# Altium PCB PCB1.PcbDoc
Units mil, origin at the board's own origin, x right, y up, seen from the top; angles counter-clockwise.
Board outline 4725 x 1770 mil, 2 copper layers (Top Layer, Bottom Layer); 13 components, 23 nets, 104 pads, 4 vias.
Unrouted connection lines stored in the file: 5.
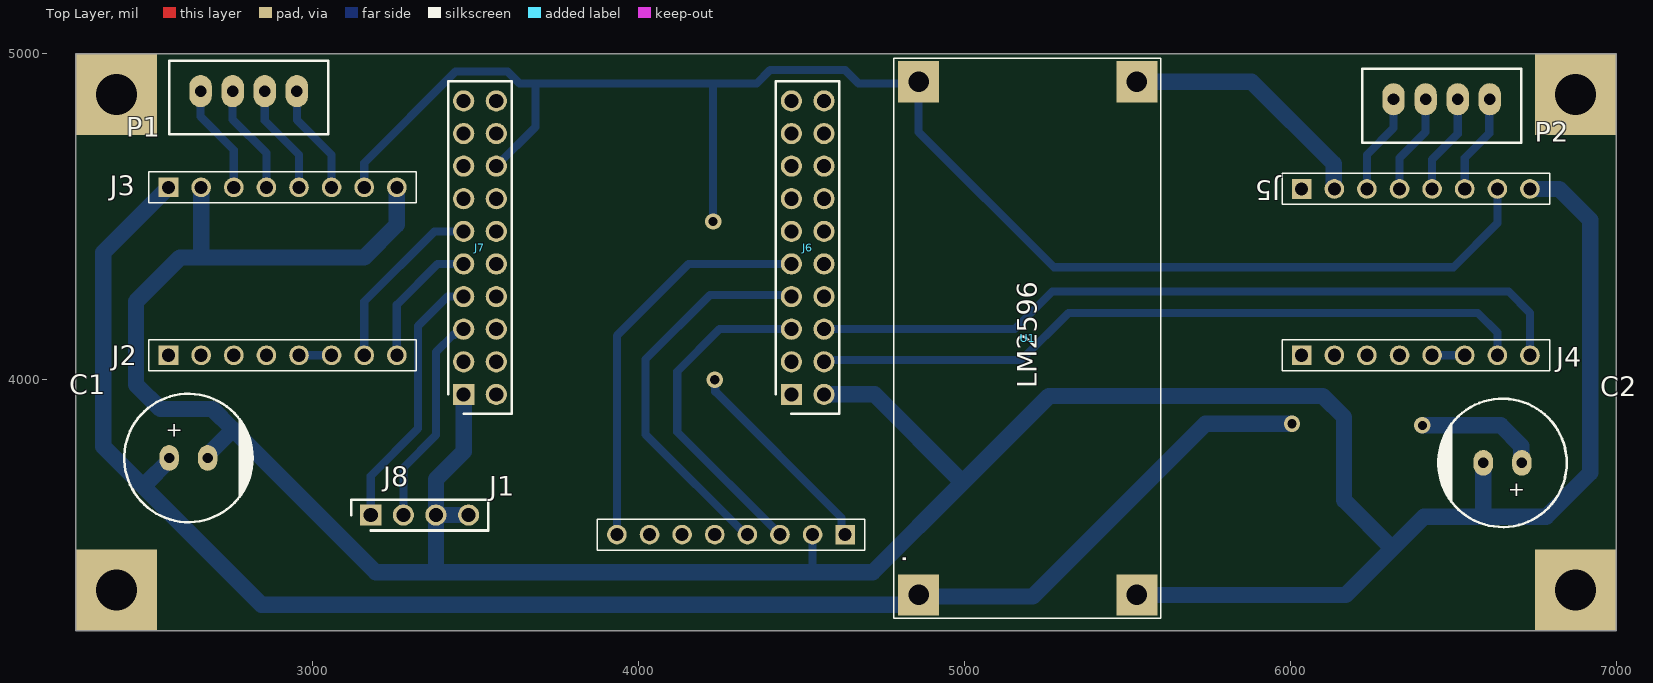
[diagram p0: Top Layer view]
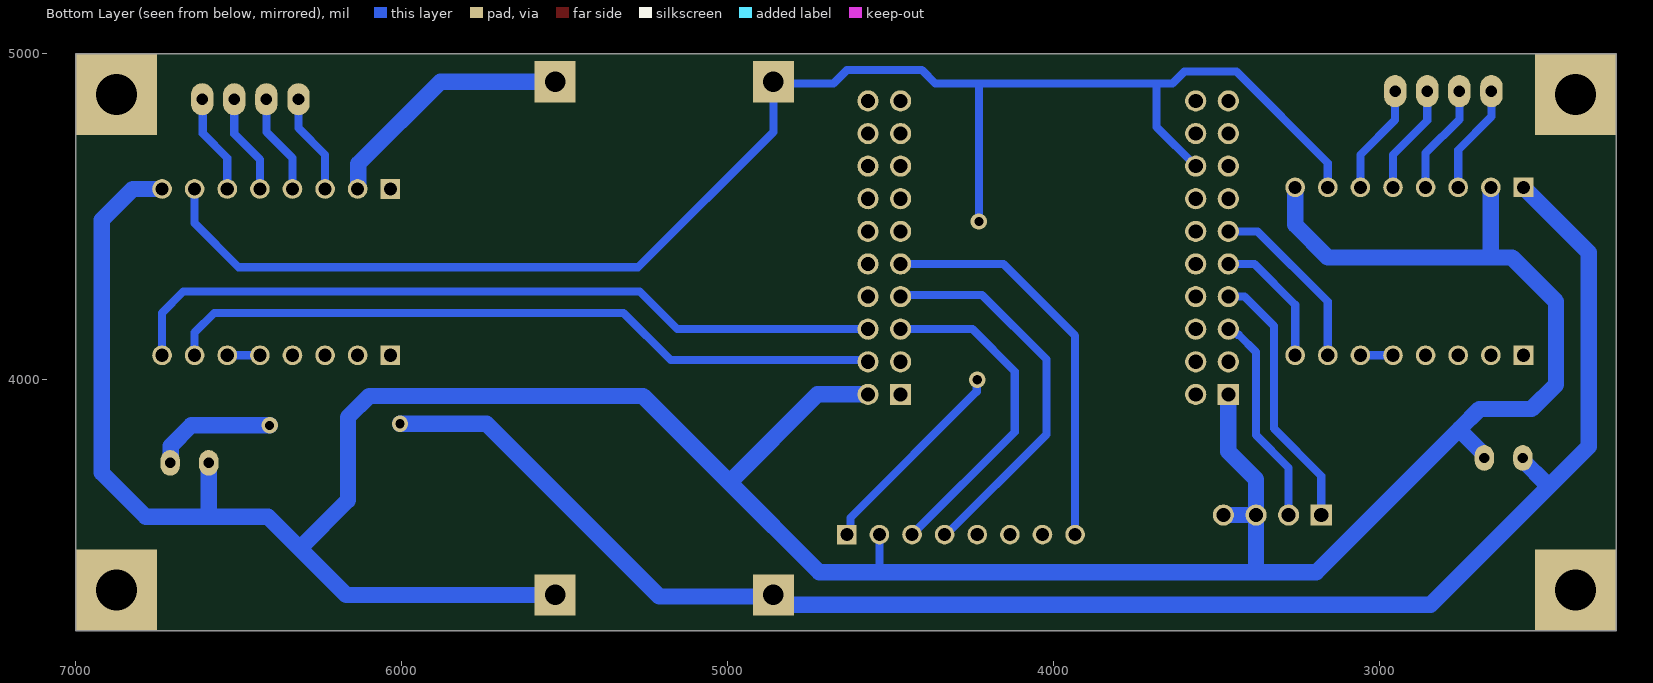
[diagram p1: Bottom Layer view, seen from below]
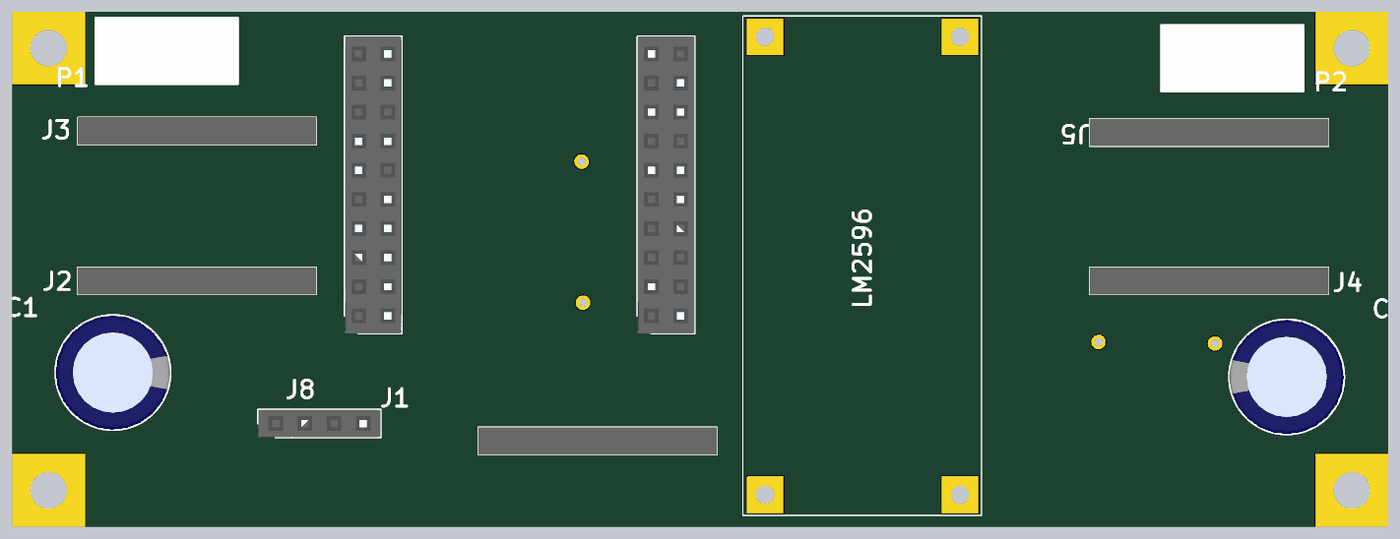
[diagram p2: 3D render of the assembled board from above, using the file's embedded part models]

## Layer stack, top to bottom
Top Solder: solder mask 0.4, Solder Resist, Dk 3.5
Top Layer: signal copper 1.4
Dielectric 1: dielectric 12.6, FR-4, Dk 4.8
Bottom Layer: signal copper 1.4
Bottom Solder: solder mask 0.4, Solder Resist, Dk 3.5

## Board outline
2275,3230 2275,5000 7000,5000 7000,3230

## Design rules (kind name [scope] priority, off if disabled: settings)
Clearance [All] p1: gap=10 ignorepadtopadclearanceinfootprint=FALSE except(0: Arc-Hole Track-Hole SMDPad-Hole THPad-Hole Via-Hole Fill-Hole Poly-Hole Region-Hole Text-Hole)
PolygonConnect [All] p1: connectstyle=Relief reliefconductorwidth=10 reliefentries=4 polygonreliefangle="90 Angle" airgapwidth=10
RoutingVias [All] p1: holewidth=28 width=50 viastyle="Through Hole" minholewidth=28 minwidth=50 maxholewidth=28 maxwidth=50
SolderMaskExpansion [All] p1: expansion=4 istentingtop=FALSE
Width [All] p1: maxlimit=75 minlimit=10 preferedwidth=25 minimp=50.000000 maximp=50.000000 favimp=50.000000
30 further rules are at their usual default settings.

## Components (designator, comment, footprint, x,y, rotation, side; value= is the part's Value field where it differs from the comment)
C1 "Cap Pol1" "CAP AL TH D10 L2.5 H12.5 - duplicate" 2620.94,3760 r0 top value=100uF
C2 "Cap Pol1" "CAP AL TH D10 L2.5 H12.5 - duplicate" 6650.94,3745 r180 top value=100uF
J1 "MPU6050" SSQ10803TSLL 4635,3525 r180 top
J2 "A4988-1L" SSQ10803TSLL 2560,4075 r0 top
J3 "A4988-1R" SSQ10803TSLL 2560,4590 r0 top
J4 "A4988-2L" SSQ10803TSLL 6035,4075 r0 top
J5 "A4988-2R" SSQ10803TSLL 6035,4585 r0 top
J6 "ESP32-L" RHDR20W64P254_2X10_2591X495X851P 4470,3955 r270 top
J7 "ESP32-R" RHDR20W64P254_2X10_2591X495X851P 3465,3955 r270 top
J8 "MAX471" RHDR4W64P0X254_1X4_1067X241X851P 3180,3585 r0 top
P1 "NEMA17_1" "JST XH B4B-XH-A" 2805.79,4885 r0 top
P2 "NEMA17_2" "JST XH B4B-XH-A" 6464.21,4860 r0 top
U1 "LM2596" STEP_DOWN-LM2596 5529.29,3340 r90 top

## Footprints (in the part's own frame and the unit in brackets; to place one, negate y for a bottom-side part, rotate by r counter-clockwise, add the part's x,y. Pads: shape width x height; smd on the part's side, far side on the other; paste and mask are expansions set on the pad)
"CAP AL TH D10 L2.5 H12.5 - duplicate" [mm] "10MM Diameter, 2.5MM Lead Spacing Aluminium Capacitor"
  oval 1.5x2 hole 0.8: 1(-1.5,0) 2(1.5,0)
  silkscreen extent -5,-5 5,5, body extent -5,-5 5,5, height 12.7
"JST XH B4B-XH-A" [mm]
  oval 1.75x2.5 hole 0.9: 1(-3.75,0) 2(-1.25,0) 3(1.25,0) 4(3.75,0)
  silkscreen extent -6.2,-3.38 6.2,2.38, body extent -6.2,-3.38 6.2,2.38, height 7
RHDR4W64P0X254_1X4_1067X241X851P [mm]
  rect 1.65x1.65 hole 1.1: 1(0,0)
  round 1.65 hole 1.1: 2(2.54,0) 3(5.08,0) 4(7.62,0)
  silkscreen extent -1.53,-1.2 9.15,1.2, body extent -1.53,-1.2 9.15,1.2, height 8.51
RHDR20W64P254_2X10_2591X495X851P [mm]
  rect 1.65x1.65 hole 1.1: 1(0,0)
  round 1.65 hole 1.1: 2(0,2.54) 3(-2.54,0) 4(-2.54,2.54) 5(-5.08,0) 6(-5.08,2.54) 7(-7.62,0) 8(-7.62,2.54) 9(-10.16,0) 10(-10.16,2.54) 11(-12.7,0) 12(-12.7,2.54) 13(-15.24,0) 14(-15.24,2.54) 15(-17.78,0) 16(-17.78,2.54) 17(-20.32,0) 18(-20.32,2.54) 19(-22.86,0) 20(-22.86,2.54)
  silkscreen extent -24.39,-1.2 1.53,3.74, body extent -24.39,-1.2 1.53,3.74, height 8.51
SSQ10803TSLL [mm]
  rect 1.53x1.53 hole 1.02: 1(0,0)
  round 1.53 hole 1.02: 2(2.54,0) 3(5.08,0) 4(7.62,0) 5(10.16,0) 6(12.7,0) 7(15.24,0) 8(17.78,0)
  silkscreen extent -1.53,-1.2 19.31,1.2, body extent -1.53,-1.2 19.31,1.2, height 8.61
STEP_DOWN-LM2596 [mm]
  rect 3.2x3.2 hole 1.6 paste-0.1 mask+0.1: 1(0,17) 2(0,0) 3(39.975,0) 4(39.975,17)
  silkscreen extent -1.8,-1.87 41.8,18.92

## Part data
C1 C2: "Polarized Capacitor (Radial)", LatestRevisionDate=17-Jul-2002, LatestRevisionNote="Re-released for DXP Platform.", PackageDescription="Polarized Capacitor (Radial); 2 Leads", PackageReference=RB7.6-15, Published=8-Jun-2000, Publisher="Altium Limited"
J1 J2 J3 J4 J5: library part SSQ-108-03-T-S-LL, "Connector", Manufacturer_Name=SAMTEC, Mouser Part Number=200-SSQ-108-03-TSLL, Arrow Part Number=SSQ-108-03-T-S-LL, Datasheet Link=https://www.mouser.co.id/datasheet/2/527/ssq_th-1370157.pdf, Height=8.51mm, Manufacturer_Part_Number=SSQ-108-03-T-S-LL, Mouser Price/Stock=https://www.mouser.com/Search/Refine.aspx?Keyword=200-SSQ-108-03-TSLL
J6 J7: library part SSQ-110-01-G-D-001, "Connector", Manufacturer_Name=SAMTEC, Mouser Part Number=200-SSQ11001GD001, Arrow Part Number=SSQ-110-01-G-D-001, Datasheet Link=http://suddendocs.samtec.com/catalog_english/ssq_th.pdf, Height=8.51mm, Manufacturer_Part_Number=SSQ-110-01-G-D-001, Mouser Price/Stock=https://www.mouser.com/Search/Refine.aspx?Keyword=200-SSQ11001GD001
J8: library part SSQ-104-01-G-S-003, "Connector", Manufacturer_Name=SAMTEC, Arrow Part Number=SSQ-104-01-G-S-003, Datasheet Link=http://suddendocs.samtec.com/catalog_english/ssq_th.pdf, Height=8.51mm, Manufacturer_Part_Number=SSQ-104-01-G-S-003
P1 P2: library part "Header 4", "Header, 4-Pin", LatestRevisionDate=17-Jul-2002, LatestRevisionNote="Re-released for DXP Platform.", Publisher="Altium Limited"
U1: library part STEP_DOWN-LM2596

## Free pads (board coordinates)
  rect 250x250 hole 125.98: 15(2400,4875) 16(2400,3355) 17(6875,3355) 18(6875,4875)

## Via types
v1: diameter 50, hole 28, Top Layer to Bottom Layer, 4 vias

## Nets (pads, with @x,y where several pads share a name; then routed paths per layer and width w, separated by ;. In a path a pad name is that pad's centre, name@x,y a point inside that pad or via, vN(x,y) a via of type N, cw(c..) or ccw(c..) an arc to the next point about the centre after c; other vN are vias at no path point)
+3.3: J1.1 J3.7 J5.7 J7.16 U1.4 | length 5571.8
  Bottom Layer w25: J3.7 3160,4665 3440,4945 3600,4945 3636.18,4908.82 3685,4908.82 ; J7.16 3685,4775 3685,4908.82 ; v1(4230,4485) 4230,4908.82 ; v1(4235,4000) 4236.69,3998.31 4236.69,3963.31 4623.37,3576.63 4623.37,3536.63 J1.1 ; J5.7 6635,4480 6500,4345 5275,4345 4860,4760 U1.4 4855,4908.82 4676.18,4908.82 4635,4950 4405,4950 4363.82,4908.82 4230,4908.82 ; 3685,4908.82 4230,4908.82
+5: J6.15
+12: C1.1 C2.1 J3.1 J5.1 U1.1 | length 5462
  Bottom Layer w50: J3.1 2360,4390 2360,3795 2475,3680 ; C1.1 2561.89,3752.61 2489.28,3680 2475,3680 ; U1.1@4860,3335 5210,3335 5740,3865 v1(6005,3865) ; U1.1 4830,3310 2845,3310 2475,3680 ; v1(6405,3860) 6645,3860 6708.27,3796.73 6708.27,3746.73 C2.1
AT: J7.5 J8.2 | length 660.6
  Bottom Layer w25: J8.2 3280,3730 3380,3830 3380,4085 3433.02,4138.02 3437.2,4138.02 3446.54,4147.35 3470.04,4147.35 J7.5@3472.4,4145
DIR1: J2.8 J7.9 | length 416.8
  Bottom Layer w25: J2.8 3260,4230 3385,4355 J7.9 J7.9@3470,4355
DIR2: J4.8 J6.6 | length 2378.4
  Bottom Layer w25: J6.6@4561.19,4155 5155,4155 5270,4270 6670,4270 6735,4205 J4.8
GND: C1.2 C2.2 J1.2 J3.2 J3.8 J5.2 J5.8 J6.2 J6.13 J7.1 J8.3 J8.4 U1.2 U1.3 | length 11064
  Bottom Layer w25: 4535,3410 J1.2
  Bottom Layer w50: J3.2 2660,4385 2650,4375 ; C1.2 2680,3769.84 2755,3844.84 2755,3850 ; J3.8 3260,4475 3160,4375 2650,4375 ; J7.1@3465,3925 3465,3780 3380,3695 J8.3 ; J8.4 J8.3 ; J6.2 4725,3955 4995,3685 ; U1.2 6170,3340 6312.5,3482.5 ; U1.3 5881.18,4913.82 6133.04,4661.96 6133.04,4586.96 J5.2 ; C2.2 6591.89,3581.89 6590,3580 ; J5.8 6825,4585 6920,4490 6920,3715 6785,3580 6590,3580 ; 2650,4375 2595,4375 2460,4240 2460,3985 2535,3910 2695,3910 2755,3850 ; 2755,3850 3195,3410 3380,3410 ; 3380,3410 J8.3 ; 3380,3410 4535,3410 4720,3410 4995,3685 ; 4995,3685 5260,3950 6100,3950 6165,3885 6165,3630 6312.5,3482.5 ; 6312.5,3482.5 6410,3580 6590,3580
MPU_INT: J1.8 J6.9 | length 1233
  Bottom Layer w25: J1.8 3935,4135 4155,4355 J6.9@4466.92,4355
NetJ2_5: J2.5 J2.6 | length 100
  Bottom Layer w25: J2.5 J2.6
NetJ3_3: J3.3 P1.1 | length 337.2
  Bottom Layer w25: P1.1 2658.15,4806.85 2760,4705 J3.3
NetJ3_4: J3.4 P1.2 | length 337.8
  Bottom Layer w25: P1.2 2756.57,4798.43 2860,4695 J3.4
NetJ3_5: J3.5 P1.3 | length 338.5
  Bottom Layer w25: P1.3 2855,4795 2960,4690 J3.5
NetJ3_6: J3.6 P1.4 | length 339.1
  Bottom Layer w25: P1.4 2953.43,4796.57 3060,4690 J3.6
NetJ4_5: J4.5 J4.6 | length 100
  Bottom Layer w25: J4.5 J4.6
NetJ5_3: J5.3 P2.1 | length 308.8
  Bottom Layer w25: J5.3 6235,4690 6316.57,4771.57 P2.1
NetJ5_4: J5.4 P2.2 | length 308.1
  Bottom Layer w25: J5.4 6335,4680 6415,4760 P2.2
NetJ5_5: J5.5 P2.3 | length 307.5
  Bottom Layer w25: J5.5 6435,4675 6513.43,4753.43 P2.3
NetJ5_6: J5.6 P2.4 | length 306.8
  Bottom Layer w15: P2.4@6610,4858.15 P2.4
  Bottom Layer w25: J5.6 6535,4680 6610,4755 P2.4@6610,4858.15
SCL: J1.3 J6.5 | length 1025.2
  Bottom Layer w25: J1.3 4120,3840 4120,4025 4250,4155 J6.5@4460.89,4155
SDA: J1.4 J6.7 | length 1185.4
  Bottom Layer w25: J1.4@4334.78,3520.22 4022.62,3832.38 4022.62,4062.62 4220,4260 J6.7@4454.53,4260
STEP1: J2.7 J7.11 | length 559.1
  Bottom Layer w25: J2.7 3160,4240 3375,4455 J7.11
STEP2: J4.7 J6.4 | length 2232.7
  Bottom Layer w25: J6.4@4557.26,4060 5175,4060 5320,4205 6575,4205 6635,4145 J4.7
VT: J7.7 J8.1 | length 828.7
  Bottom Layer w25: J8.1 3180,3705 3325,3850 3325,4165 3415,4255 J7.7@3476.4,4255
pads on no net: J1.5 J1.6 J1.7 J2.1 J2.2 J2.3 J2.4 J4.1 J4.2 J4.3 J4.4 J6.1 J6.3 J6.8 J6.10 J6.11 J6.12 J6.14 J6.16 J6.17 J6.18 J6.19 J6.20 J7.2 J7.3 J7.4 J7.6 J7.8 J7.10 J7.12 J7.13 J7.14 J7.15 J7.17 J7.18 J7.19 J7.20

## Silkscreen, mask and mechanical layers (free items; w line width, h text height)
Mechanical 1:
  the board outline again, w10

## Dimensions
4580,3895 to 4585,3602.44 on Mechanical 1
3802.56,3175 to 2897.56,3212.55 on Mechanical 1
2265,5045 to 2515,5040 on Mechanical 1
4579.28,4365 to 3476.83,4395 on Mechanical 1
5935,4035 to 4830,2882.55 on Mechanical 1
7000,5000 to 7020,3230 on Mechanical 1
2275,5005 to 7000,5030 on Mechanical 1

## Text inside footprints (layer, text, board x,y; h text height)
C1: Top Overlay "+" at 2552.05,3809.21 h78.74
C2: Top Overlay "+" at 6719.84,3695.79 h78.74 r180